# Altium PCB Hung_Doan.PcbDoc
Units mil, origin at the board's own origin, x right, y up, seen from the top; angles counter-clockwise.
Board outline 3868.94 x 2783 mil, 2 copper layers (Top Layer, Bottom Layer); 19 components, 30 nets, 121 pads, 9 vias.
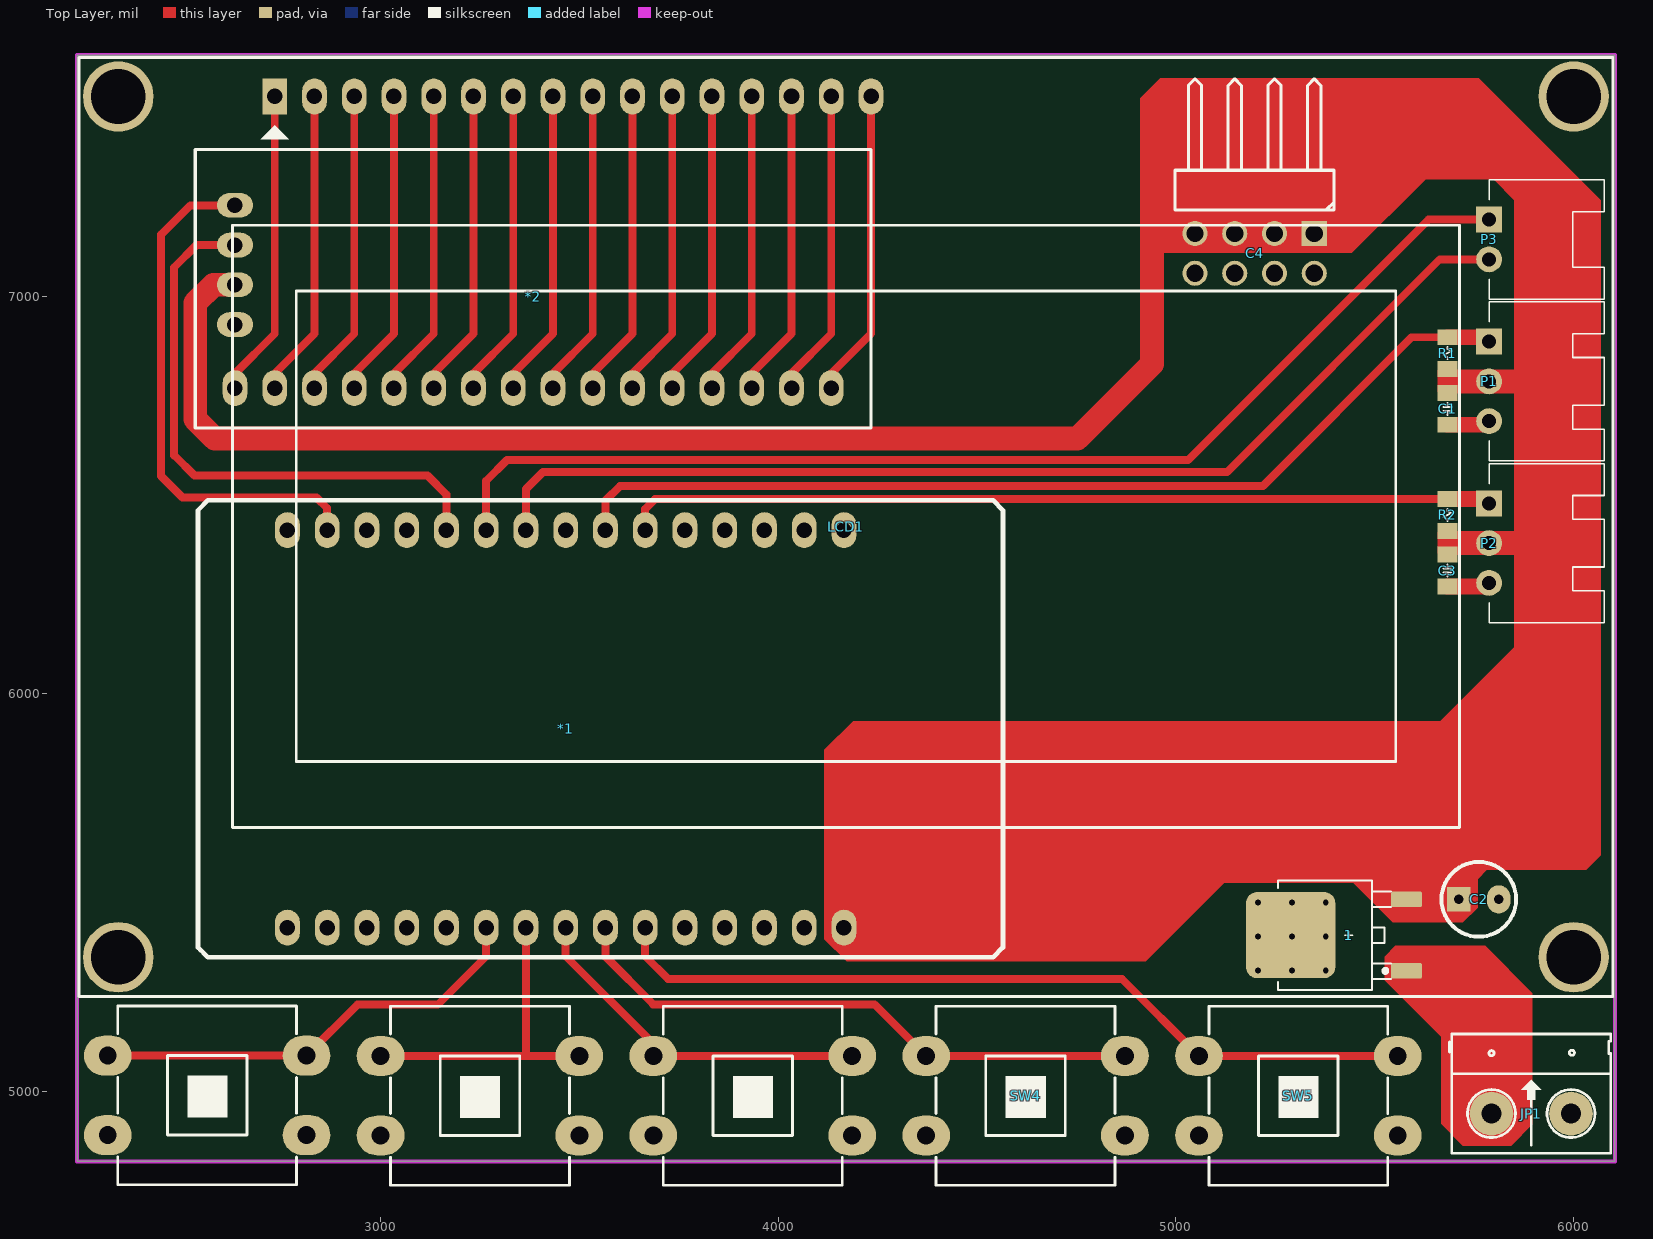
[diagram p0: Top Layer view]
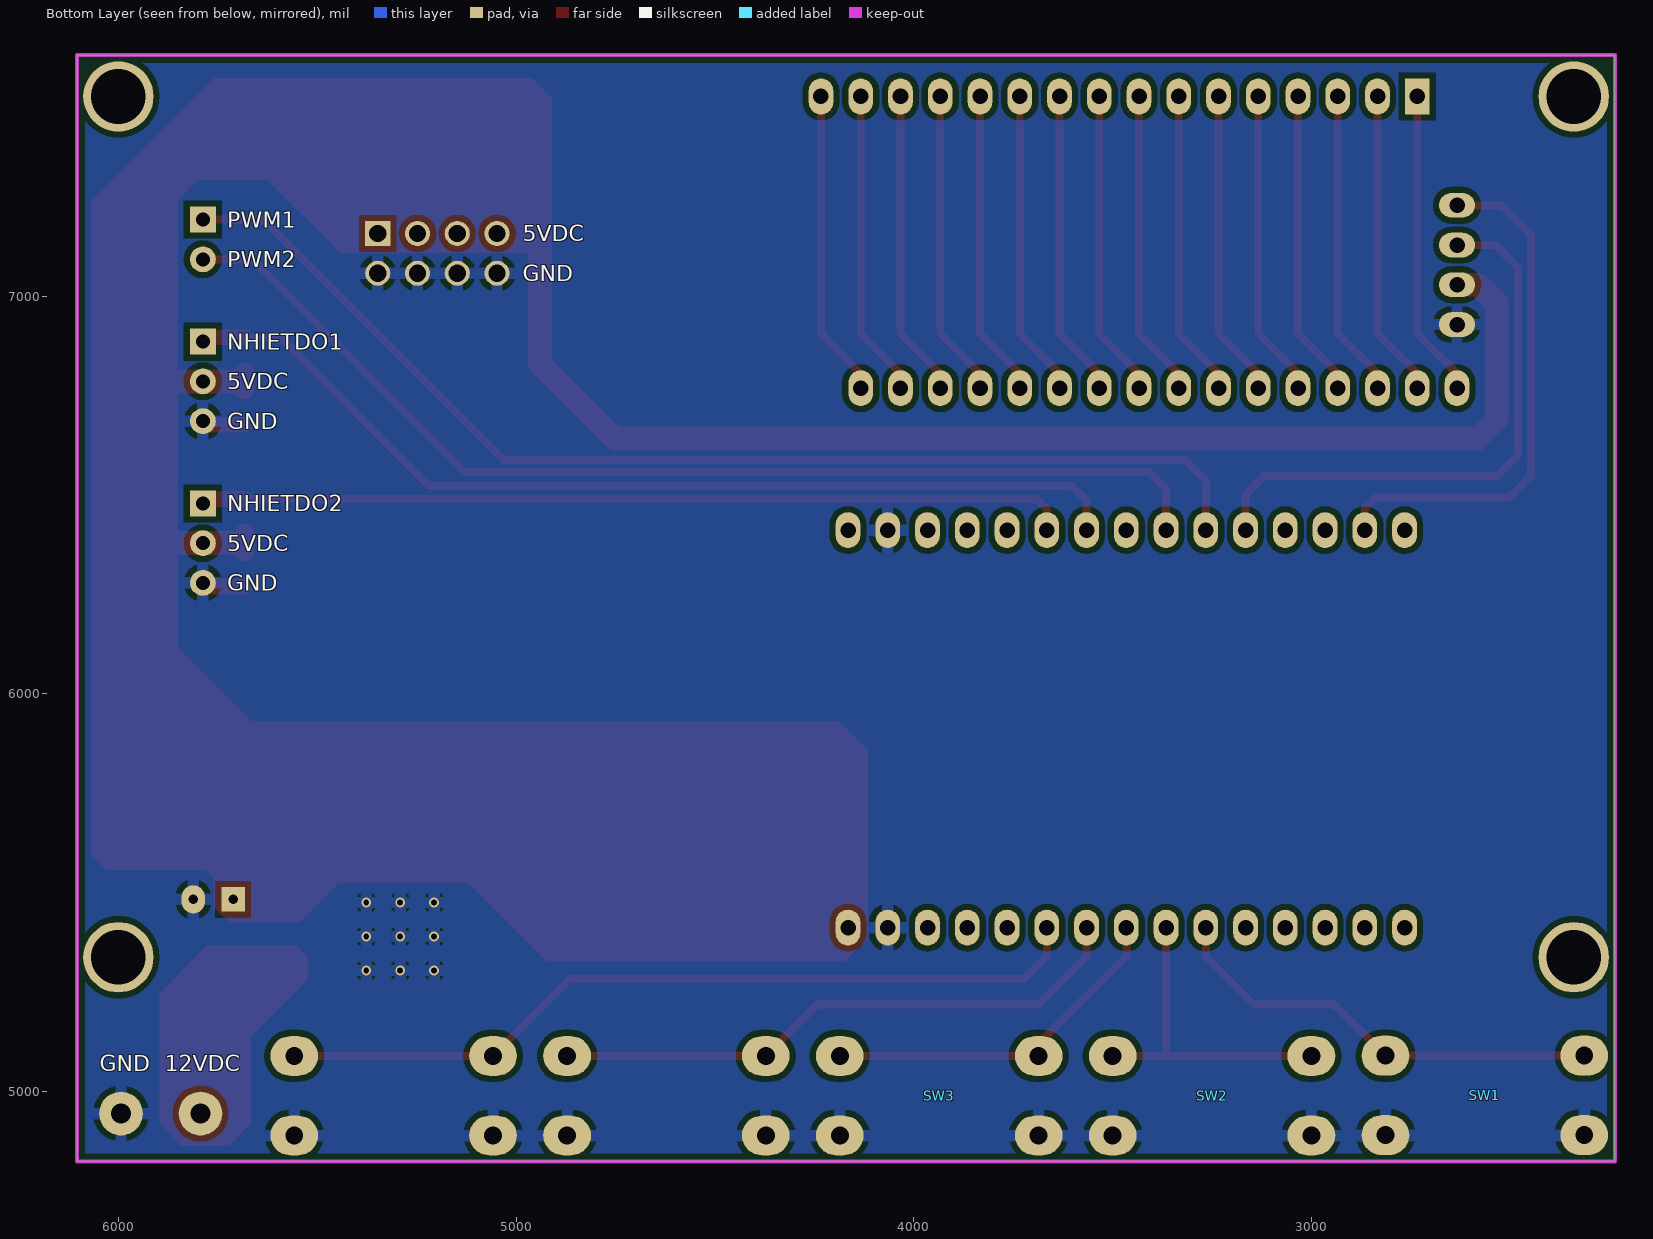
[diagram p1: Bottom Layer view, seen from below]

## Layer stack, top to bottom
Top Solder: solder mask 0.4, Solder Resist, Dk 3.5
Top Layer: signal copper 1.4
Dielectric 1: dielectric 12.6, FR-4, Dk 4.8
Bottom Layer: signal copper 1.4
Bottom Solder: solder mask 0.4, Solder Resist, Dk 3.5

## Board outline
2235.63,4824 2235.62,7607 6104.56,7607 6104.56,4824

## Design rules (kind name [scope] priority, off if disabled: settings)
Clearance Clearance_1 [(InNamedPolygon('phu mass'))] p1: gap=10 ignorepadtopadclearanceinfootprint=FALSE except(0: Arc-Hole Track-Hole SMDPad-Hole THPad-Hole Via-Hole Fill-Hole Poly-Hole Region-Hole Text-Hole; 15: Arc-Fill Arc-Poly Arc-Region Track-Fill Track-Poly Track-Region SMDPad-Fill SMDPad-Poly SMDPad-Region THPad-Fill THPad-Poly THPad-Region Via-Fill Via-Poly Via-Region Fill-Fill Fill-Poly Fill-Region Poly-Poly Poly-Region Region-Region)
Clearance [All] p2: gap=10 ignorepadtopadclearanceinfootprint=FALSE except(0: Arc-Hole Track-Hole SMDPad-Hole THPad-Hole Via-Hole Fill-Hole Poly-Hole Region-Hole Text-Hole)
PlaneConnect [All] p1: planeconnectstyle=Relief reliefexpansion=15 reliefentries=4 reliefconductorwidth=30 reliefairgap=15
PolygonConnect [All] p1: connectstyle=Relief reliefconductorwidth=30 reliefentries=4 polygonreliefangle="90 Angle" airgapwidth=15
RoutingVias [All] p1: holewidth=28 width=50 viastyle="Through Hole" minholewidth=28 minwidth=50 maxholewidth=28 maxwidth=50
SolderMaskExpansion [All] p1: expansion=4
Width [All] p1: maxlimit=200 minlimit=10 preferedwidth=10
29 further rules are at their usual default settings.

## Components (designator, comment, footprint, x,y, rotation, side; value= is the part's Value field where it differs from the comment)
1 "78Mxx" TO252 5434.33,5393.04 r90 top
*1 "Module ESP32" "Module ESP32" 3515,5937 r90 top
*2 "Module I2C" "Module I2C" 4233,7374 r180 top
C1 "104" CAP-0805-SC 5683.39,6717 r270 top
C2 "100uF" CA-ALU-2.54 5762,5483 r0 top value=104
C3 "104" CAP-0805-SC 5683.39,6310 r270 top
C4 "JP4x2" JP4-D2C 5198,7108 r180 top
JP1 "Header 2_1" HED2 5794,4944 r0 top value="Header 2"
LCD1 "LCD 20x4" "LCD 20x4" 4170,6420 r0 top
P1 "HD3" "XH 2.54-3P-CURVED" 5788,6886 r270 top
P2 "HD3" "XH 2.54-3P-CURVED" 5788,6479 r270 top
P3 "HEADER 2" "XH 2.54-2P-CURVED" 5788,7193 r270 top
R1 "10K" RES-0805-SC 5683,6857 r270 top
R2 "10K" RES-0805-SC 5683,6450 r270 top
SW1 "SW" SW4B#1 2813,5090 r180 bottom value="Button chip 4 pin"
SW2 "SW" SW4B#1 3499.25,5089 r180 bottom value="Button chip 4 pin"
SW3 "SW" SW4B#1 4185.5,5089 r180 bottom value="Button chip 4 pin"
SW4 "SW" SW4B#2 4871.75,5089 r180 top value="Button chip 4 pin"
SW5 "SW" SW4B#2 5558,5089 r180 top value="Button chip 4 pin"

## Footprints (in the part's own frame and the unit in brackets; to place one, negate y for a bottom-side part, rotate by r counter-clockwise, add the part's x,y. Pads: shape width x height; smd on the part's side, far side on the other; paste and mask are expansions set on the pad)
CA-ALU-2.54 [mm]
  rect 1.5x1.58 hole 0.6: 1(-1.27,0)
  oval 1.5x1.8 hole 0.6: 2(1.27,0)
  silkscreen extent -2.39,-2.39 2.39,2.39, body extent -2,-2.03 1.99,1.97, height 7.01
CAP-0805-SC [mil] "smdchip"
  rect 40x50 smd: 1(-39.99,-0.39) 2(40.01,-0.39)
  silkscreen extent -15,-10 15,10, body extent -39,-25 39,25, height 31
HED2 [mil] "Header 2, 2 pin, hight 300mil, Pin to Pin 200, Colour Green"
  round 110 hole 50: 1(0,0) 2(200,0)
  silkscreen extent -106,-100 300,200, body extent -92,-140 302,155, height 394
JP4-D2C [mm] "08 pins, dual row, right angled, gold plating"
  rect 1.6x1.6 hole 1.1: 1(-3.81,-1.27)
  round 1.6 hole 1.1: 2(-1.27,-1.27) 3(1.27,-1.27) 4(3.81,-1.27) 5(3.81,1.27) 6(1.27,1.27) 7(-1.27,1.27) 8(-3.81,1.27)
  silkscreen extent -5.08,-11.15 5.08,-2.77, body extent -5.08,-11.33 5.08,1.57, height 5.09
"LCD 20x4" [mm] "LCD dipslay 20x4, 16 pin"
  rect 1.575x2.286 hole 0.991: 1(-36.5,27.5)
  oval 1.575x2.286 hole 0.991: 2(-33.96,27.5) 3(-31.42,27.5) 4(-28.88,27.5) 5(-26.34,27.5) 6(-23.8,27.5) 7(-21.26,27.5) 8(-18.72,27.5) 9(-16.18,27.5) 10(-13.64,27.5) 11(-11.1,27.5) 12(-8.56,27.5) 13(-6.02,27.5) 14(-3.48,27.5) 15(-0.94,27.5) 16(1.6,27.5)
  round 4.5 hole 3.5: "Hole 0"(-46.5,-27.5) "Hole 0"(-46.5,27.5) "Hole 0"(46.5,-27.5) "Hole 0"(46.5,27.5)
  silkscreen extent -49,-30 49,30, body extent -49,-30 49,30, height 10.6
"Module ESP32" [mil]
  oval 90x62 hole 39: 1(-525,750) 2(-525,650) 3(-525,550) 4(-525,450) 5(-525,350) 6(-525,250) 7(-525,150) 8(-525,50) 9(-525,-50) 10(-525,-150) 11(-525,-250) 12(-525,-350) 13(-525,-450) 14(-525,-550) 15(-525,-650) 16(475,-650) 17(475,-550) 18(475,-450) 19(475,-350) 20(475,-250) 21(475,-150) 22(475,-50) 23(475,50) 24(475,150) 25(475,250) 26(475,350) 27(475,450) 28(475,550) 29(475,650) 30(475,750)
  silkscreen extent -600,-1050 550,975, body extent -587,-1034 535,971, height 441
"Module I2C" [mil]
  oval 62x90 hole 39: 1(100,605) 2(200,605) 3(300,605) 4(400,605) 5(500,605) 6(600,605) 7(700,605) 8(800,605) 9(900,605) 10(1000,605) 11(1100,605) 12(1200,605) 13(1300,605) 14(1400,605) 15(1500,605) 16(1600,605)
  oval 90x62 hole 39: 17(1600,445) 18(1600,345) 19(1600,245) 20(1600,145)
  silkscreen extent 0,5 1700,705
RES-0805-SC [mil]
  rect 40x50 smd: 1(-40,0) 2(40,0)
  silkscreen extent -15,-10 15,10, body extent -38,-25 40,25, height 31
SW4B#1 [mil] "SW button 4pin, 450 x 450 mil"
  oval 120x100 hole 45: 1(0,-200) 2(500,0) 3(500,-200) 4(0,0)
  body extent -3,-343 469,129, height 169
SW4B#2 [mil] "SW button 4pin, 450 x 450 mil"
  oval 120x100 hole 45: 1(0,200) 2(500,0) 3(500,200) 4(0,0)
  silkscreen extent 25,-125 475,325, body extent -3,-129 469,343, height 169
TO252 [mm]
  rrect25% 1x2 smd: 1(-2.285,-3.7) 3(2.285,-3.7)
  rrect25% 5.5x5.7 smd: 2(0,3.7)
  silkscreen extent -3.5,-2.7 3.5,4.5, body extent -3.3,-3.95 3.3,5.76, height 2.31
"XH 2.54-2P-CURVED" [mil]
  rect 65x65 hole 35.43: 1(0,0)
  round 65 hole 35.43: 2(100,0)
  silkscreen extent -100,0 200,290, body extent -96,-45 196,306, height 234
"XH 2.54-3P-CURVED" [mil]
  rect 65x65 hole 35.43: 1(0,0)
  round 65 hole 35.43: 2(100,0) 3(200,0)
  silkscreen extent -100,0 300,290, body extent -95,-45 295,291, height 235

## Part data
C1 C3: library part CAP-SMDCHIP
C2: library part CN-ALU-DIP, "Capacitor (Semiconductor SIM Model)", LatestRevisionDate=17-Jul-2002, LatestRevisionNote="Re-released for DXP Platform.", PackageReference=C1206, Publisher="Altium Limited"
C4: "WR-PHD 2.54 mm Dual Socket Header", Manufacturer="Würth Elektronik eiSos GmbH", partNo=61300821821, ComponentLink1 Description=Manufacturer, ComponentLink1URL=http://www.we-online.com, ComponentLink2 Description=Datasheet, ComponentLink2URL=http://katalog.we-online.de/em/datasheet/6130xx21821.pdf, Created by="Karrer Zheng", Created Date="29 March 2013", NoPins=08
JP1: "Header, 2-Pin", Manufacturer="Generic Components", Class=Connector
P1 P2: library part "HEADER 3"
R1 R2: library part RES
SW1 SW2 SW3 SW4 SW5: library part SW4, "Switch button 4 pin"

## Via types
v1: diameter 25, hole 15, Top Layer to Bottom Layer, tented both sides, 9 vias

## Nets (pads, with @x,y where several pads share a name; then routed paths per layer and width w, separated by ;. In a path a pad name is that pad's centre, name@x,y a point inside that pad or via, vN(x,y) a via of type N, cw(c..) or ccw(c..) an arc to the next point about the centre after c; other vN are vias at no path point)
5VDC: 1.3 *1.15 *2.18 C1.1 C2.1 C3.1 C4.1 C4.2 C4.3 C4.4 P1.2 P2.2 R1.2 R2.2 | length 3680.2
  Top Layer w50: C3.1@5683,6358 R2.2@5683,6402 ; C1.1@5683,6765 R1.2@5683,6809
  Top Layer w60: *2.18 2579,7029 2533,6983 2533,6691 2582,6642 4752,6642 4940,6830 4940,7192 ; 5710,6379 P2.2 5867,6379 ; 5710,6786 P1.2 5867,6786
12VDC: 1.1 JP1.1
GND: 1.2 *1.14 *1.17 *2.17 C1.2 C2.2 C3.2 C4.5 C4.6 C4.7 C4.8 JP1.2 P1.3 P2.3 SW1.1 SW1.3 SW2.1 SW2.3 SW3.1 SW3.3 SW4.1 SW4.3 SW5.1 SW5.3 | length 217.5
  Top Layer w40: C3.2 5778.99,6269.99 P2.3 ; C1.2 5778.99,6676.99 P1.3
  other v1: 5206,5304 5291.5,5304 5377,5304 5206,5389.5 5291.5,5389.5 5377,5389.5 5206,5475 5291.5,5475 5377,5475
Net*2_1: *2.1 LCD1.16 | length 775.1
  Top Layer w20: *2.1 4133,6806 4232.99,6905.99 LCD1.16
Net*2_2: *2.2 LCD1.15 | length 775.1
  Top Layer w20: *2.2 4033,6806 4132.99,6905.99 LCD1.15
Net*2_3: *2.3 LCD1.14 | length 775.1
  Top Layer w20: *2.3 3933,6806 4032.99,6905.99 LCD1.14
Net*2_4: *2.4 LCD1.13 | length 775.1
  Top Layer w20: *2.4 3833,6806 3932.99,6905.99 LCD1.13
Net*2_5: *2.5 LCD1.12 | length 775.1
  Top Layer w20: *2.5 3733,6806 3832.99,6905.99 LCD1.12
Net*2_6: *2.6 LCD1.11 | length 775.1
  Top Layer w20: *2.6 3633,6806 3732.99,6905.99 LCD1.11
Net*2_7: *2.7 LCD1.10 | length 775.1
  Top Layer w20: *2.7 3533,6806 3632.99,6905.99 LCD1.10
Net*2_8: *2.8 LCD1.9 | length 775.1
  Top Layer w20: *2.8 3433,6806 3532.99,6905.99 LCD1.9
Net*2_9: *2.9 LCD1.8 | length 775.1
  Top Layer w20: *2.9 3333,6806 3432.99,6905.99 LCD1.8
Net*2_10: *2.10 LCD1.7 | length 775.1
  Top Layer w20: *2.10 3233,6806 3332.99,6905.99 LCD1.7
Net*2_11: *2.11 LCD1.6 | length 775.1
  Top Layer w20: *2.11 3133,6806 3232.99,6905.99 LCD1.6
Net*2_12: *2.12 LCD1.5 | length 775.1
  Top Layer w20: *2.12 3033,6806 3132.99,6905.99 LCD1.5
Net*2_13: *2.13 LCD1.4 | length 775.1
  Top Layer w20: *2.13 2933,6806 3032.99,6905.99 LCD1.4
Net*2_14: *2.14 LCD1.3 | length 775.1
  Top Layer w20: *2.14 2833,6806 2932.99,6905.99 LCD1.3
Net*2_15: *2.15 LCD1.2 | length 775.1
  Top Layer w20: *2.15 2733,6806 2832.99,6905.99 LCD1.2
Net*2_16: *2.16 LCD1.1 | length 775.1
  Top Layer w20: *2.16 2633,6806 2732.99,6905.99 LCD1.1
NHIETDO1: *1.22 P1.1 R1.1 | length 2471.8
  Top Layer w20: *1.22 3565,6486 3602,6523 5219,6523 5593,6897 R1.1 ; P1.1@5777,6897 P1.1
  Top Layer w40: R1.1 P1.1@5777,6897
NHIETDO2: *1.21 P2.1 R2.1 | length 2190.9
  Top Layer w20: *1.21 3665,6465 3690,6490 R2.1 ; P2.1@5777,6490 P2.1
  Top Layer w40: R2.1 P2.1@5777,6490
NUTNHAN1: *1.6 SW1.2 SW1.4 | length 1127.6
  Top Layer w20: SW1.2 SW1.4 2941,5218 3143,5218 3265,5340 *1.6
NUTNHAN2: *1.7 SW2.2 SW2.4 | length 823
  Top Layer w20: SW2.2 3365,5089 ; *1.7 3365,5089 ; SW2.4 3365,5089
NUTNHAN3: *1.8 SW3.2 SW3.4 | length 914.3
  Top Layer w20: *1.8 3465,5340 3685.5,5119.5 SW3.2 SW3.4
NUTNHAN4: *1.9 SW4.2 SW4.4 | length 1483.3
  Top Layer w20: *1.9 3565,5339 3685,5219 4241.75,5219 SW4.2 SW4.4
NUTNHAN5: *1.10 SW5.2 SW5.4 | length 2069
  Top Layer w20: *1.10 3665,5340 3722,5283 4864,5283 SW5.2 SW5.4
PWM1: *1.25 P3.1 | length 2919.1
  Top Layer w20: *1.25 3265,6536 3317,6588 5031,6588 5636,7193 P3.1
PWM2: *1.24 P3.2 | length 2765.4
  Top Layer w20: *1.24 3365,6515 3408,6558 5129,6558 5664,7093 P3.2
SCL: *1.29 *2.20 | length 1330.2
  Top Layer w20: *2.20 2521,7229 2447,7155 2447,6548 2501,6494 2838,6494 2865,6467 *1.29
SDA: *1.26 *2.19 | length 1464.2
  Top Layer w20: *2.19 2536,7129 2480,7073 2480,6600 2531,6549 3117,6549 3165,6501 *1.26
pads on no net: "LCD1.Hole 0" *1.1 *1.2 *1.3 *1.4 *1.5 *1.11 *1.12 *1.13 *1.16 *1.18 *1.19 *1.20 *1.23 *1.27 *1.28 *1.30

## Polygon pours and split planes (outlines as drawn)
GND on Bottom Layer "phu mass" (solid, pour order 0): 2235.62,7607 2235.63,7607 2235.63,4824 6104.56,4824 6104.56,7607

## Keep-outs
Keep-Out Layer:
  the board outline again, w10

## Other copper
Top Layer:
  region net 5VDC: 5722,5425 5546,5425 5446,5525 5122,5525 4924,5327 4172,5327 4116,5383 4116,5859 4188,5931 5665,5931 5851,6117 5851,7242 5799,7294 5628,7294 5443,7109 4910,7109 4910,7498.37 4960.63,7549 5762,7549 6069,7242 6069,5594 6032,5557 5782,5557 5759,5534 5759,5462
  region net 12VDC: 5525,5339 5525,5279 5667,5137 5667,4918 5722,4863 5843,4863 5897,4917 5897,5247 5778,5366 5552,5366

## Silkscreen, mask and mechanical layers (free items; w line width, h text height)
Bottom Overlay:
  text "PWM1" at 5727,7173.01 h40
  text "5VDC" at 4983,7138.01 h40
  text "PWM2" at 5727,7073.01 h40
  text "GND" at 4983,7038.01 h40
  text "NHIETDO1" at 5727,6866.01 h40
  text "5VDC" at 5727,6766.01 h40
  text "GND" at 5727,6666.01 h40
  text "NHIETDO2" at 5727,6459.01 h40
  text "5VDC" at 5727,6359.01 h40
  text "GND" at 5727,6259.01 h40
  text "12VDC" at 5883.97,5051 h40
  text "GND" at 6047.32,5051 h40